# EAGLE board pi-crust-plus (EAGLE 7.6.0)
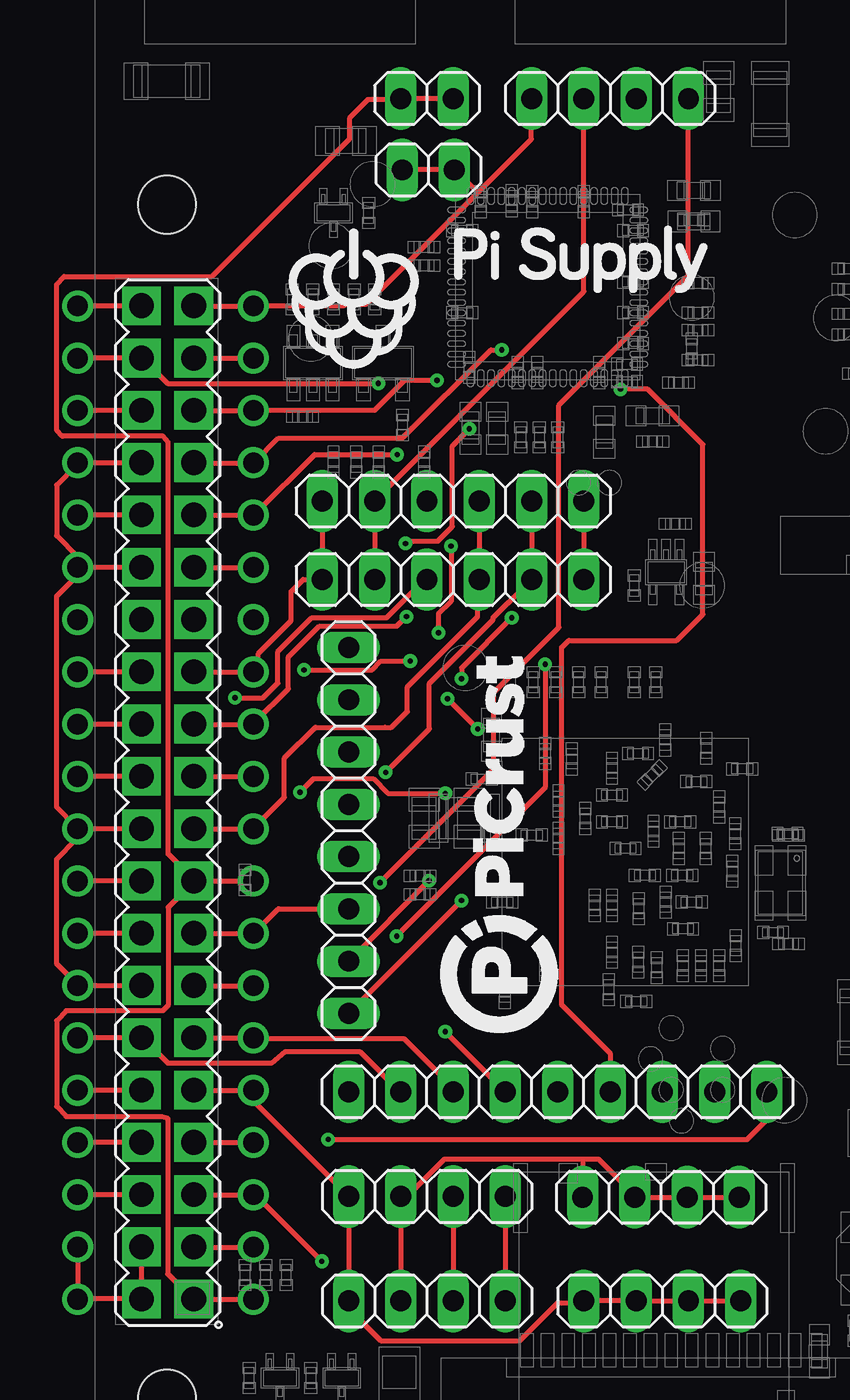
[diagram p0: board, top side]
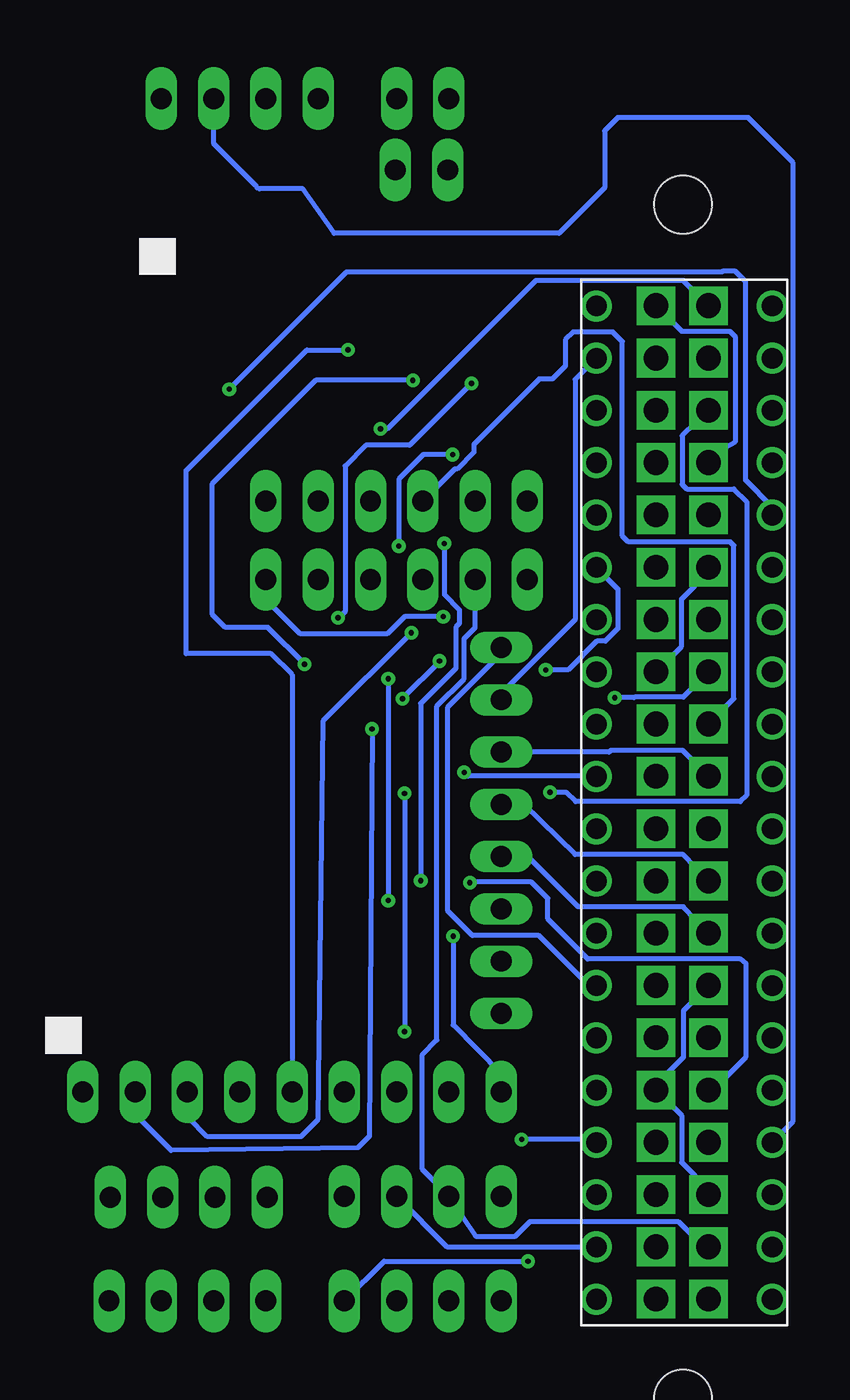
[diagram p1: board, bottom side, seen from below]

No outline drawn. Coordinates in mm, seen from the top.
Copper layers (1*16): Top 0.035mm / dielectric 1.5mm / Bottom 0.035mm
Design rules "default *": minimum track width 10mil, minimum drill 6mil, track to track 6mil, track to pad 6mil, pad to pad 6mil, via to via 6mil, smd to smd 6mil, copper to edge 40mil, drill to drill 8mil, minimum pad ring 10mil, minimum via ring 8mil, stop-mask expansion 3mil, vias tented up to drill 12mil, thermal gap 10mil
Holes 2.8 mm at 0.01,0 0.01,58
tRestrict: area -1.5,-1.6 to 1.6,1.5; area -1.5,56.4 to 1.6,59.5
bRestrict: area -1.5,-1.6 to 1.6,1.5; area -1.5,56.4 to 1.6,59.5

## Footprints (pad centres in the part's own frame; a part is rotated, then mirrored left to right if it is on the bottom)
1X04 = drill 1.016 long: 1 -3.81,0; 2 -1.27,0; 3 1.27,0; 4 3.81,0
1X02 = drill 1.016 long: 1 -1.27,0; 2 1.27,0
1X09 = drill 1.016 long: 1 -10.16,0; 2 -7.62,0; 3 -5.08,0; 4 -2.54,0; 5 0,0; 6 2.54,0; 7 5.08,0; 8 7.62,0; 9 10.16,0
1X06 = drill 1.016 long: 1 -6.35,0; 2 -3.81,0; 3 -1.27,0; 4 1.27,0; 5 3.81,0; 6 6.35,0
1X08 = drill 1.016 long: 1 -8.89,0; 2 -6.35,0; 3 -3.81,0; 4 -1.27,0; 5 1.27,0; 6 3.81,0; 7 6.35,0; 8 8.89,0
MA20-2 = drill 1.2 pad 1.88 square: 1 -15.24,-1.27; 2 -15.24,1.27; 3 -12.7,-1.27; 4 -12.7,1.27; 5 -10.16,-1.27; 6 -10.16,1.27; 7 -7.62,-1.27; 8 -7.62,1.27; 9 -5.08,-1.27; 10 -5.08,1.27; 11 -2.54,-1.27; 12 -2.54,1.27; 13 0,-1.27; 14 0,1.27; 15 2.54,-1.27; 16 2.54,1.27; 17 5.08,-1.27; 18 5.08,1.27; 19 7.62,-1.27; 20 7.62,1.27; 21 10.16,-1.27; 22 10.16,1.27; 23 12.7,-1.27; 24 12.7,1.27; 25 15.24,-1.27; 26 15.24,1.27; 27 17.78,-1.27; 28 17.78,1.27; 29 20.32,-1.27; 30 20.32,1.27; 31 22.86,-1.27; 32 22.86,1.27; 33 25.4,-1.27; 34 25.4,1.27; 35 27.94,-1.27; 36 27.94,1.27; 37 30.48,-1.27; 38 30.48,1.27; 39 33.02,-1.27; 40 33.02,1.27
MDF7-40D-2.54DSA = drill 1: P$1 -15.25,4.27; P$2 -12.71,4.27; P$3 -10.17,4.27; P$4 -7.63,4.27; P$5 -5.09,4.27; P$6 -2.55,4.27; P$7 -0.01,4.27; P$8 2.53,4.27; P$9 5.07,4.27; P$10 7.61,4.27; P$11 10.15,4.27; P$12 12.69,4.27; P$13 15.23,4.27; P$14 17.77,4.27; P$15 20.31,4.27; P$16 22.85,4.27; P$17 25.39,4.27; P$18 27.93,4.27; P$19 30.47,4.27; P$20 33.01,4.27; P$21 -15.25,-4.27; P$22 -12.71,-4.27; P$23 -10.17,-4.27; P$24 -7.63,-4.27; P$25 -5.09,-4.27; P$26 -2.55,-4.27; P$27 -0.01,-4.27; P$28 2.53,-4.27; P$29 5.07,-4.27; P$30 7.61,-4.27; P$31 10.15,-4.27; P$32 12.69,-4.27; P$33 15.23,-4.27; P$34 17.77,-4.27; P$35 20.31,-4.27; P$36 22.85,-4.27; P$37 25.39,-4.27; P$38 27.93,-4.27; P$39 30.47,-4.27; P$40 33.01,-4.27

## Placement (x,y rotation side)
JP1  GND  [1X04]  24.07,4.74 0 top
JP2  GND  [1X02]  12.7,59.69 0 top
JP3  5V  [1X04]  24,9.78 0 top
JP4  3V3  [1X02]  12.64,63.16 0 top
JP5  [1X09]  18.99,14.9 180 top
JP6  UART  [1X04]  21.53,63.16 0 top
JP7  SPI 0  [1X06]  13.91,43.6 0 top
JP8  SPI 1  [1X06]  13.91,39.79 0 top
JP9  I2C  [1X04]  12.64,9.82 0 top
JP10  I2C  [1X04]  12.64,4.74 0 top
JP11  [1X08]  8.83,27.6 90 top
SV1  [MA20-2]  0.04,20.07 90 top
U$1  MDF7-40D-2.54DSA  [MDF7-40D-2.54DSA]  -0.06,20.07 90 bottom

## Library data of the parts
JP1-JP11 = pinhead
SV1 U$1 = pi-crust

## Nets
3V3: JP4.1 JP4.2 SV1.1 SV1.17 U$1.P$1 U$1.P$9
5V: JP3.1 JP3.2 JP3.3 JP3.4 JP6.2 JP7.2 JP8.2 JP9.2 JP10.2 SV1.2 SV1.4 U$1.P$21 U$1.P$22
GND: JP1.1 JP1.2 JP1.3 JP1.4 JP2.1 JP2.2 JP6.1 JP7.1 JP8.1 JP9.1 JP10.1 SV1.6 SV1.9 SV1.14 SV1.20 SV1.25 SV1.30 SV1.34 SV1.39 U$1.P$5 U$1.P$13 U$1.P$20 U$1.P$23 U$1.P$27 U$1.P$30 U$1.P$35 U$1.P$37
GPIO_04: JP5.1 SV1.7 U$1.P$4
GPIO_05: JP5.2 SV1.29 U$1.P$15
GPIO_06: JP5.3 SV1.31 U$1.P$16
GPIO_12: JP5.4 SV1.32 U$1.P$36
GPIO_13: JP5.5 SV1.33 U$1.P$17
GPIO_16: JP5.6 SV1.36 U$1.P$38
GPIO_17: JP5.7 SV1.11 U$1.P$6
GPIO_18: JP5.8 SV1.12 U$1.P$26
GPIO_19: JP5.9 SV1.35 U$1.P$18
GPIO_20: JP11.1 SV1.38 U$1.P$39
GPIO_21: JP11.2 SV1.40 U$1.P$40
GPIO_22: JP11.3 SV1.15 U$1.P$8
GPIO_23: JP11.4 SV1.16 U$1.P$28
GPIO_24: JP11.5 SV1.18 U$1.P$29
GPIO_25: JP11.6 SV1.22 U$1.P$31
GPIO_26: JP11.7 SV1.37 U$1.P$19
GPIO_27: JP11.8 SV1.13 U$1.P$7
I2C_SCL: JP9.4 JP10.4 SV1.5 U$1.P$3
I2C_SDA: JP9.3 JP10.3 SV1.3 U$1.P$2
SPI_CE_0: JP7.3 SV1.24 U$1.P$32
SPI_CE_1: JP8.3 SV1.26 U$1.P$33
SPI_MISO: JP7.5 JP8.5 SV1.21 U$1.P$11
SPI_MOSI: JP7.4 JP8.4 SV1.19 U$1.P$10
SPI_SCLK: JP7.6 JP8.6 SV1.23 U$1.P$12
UART_RX: JP6.4 SV1.10 U$1.P$25
UART_TX: JP6.3 SV1.8 U$1.P$24

## Tracks (layer width: path | path; a pad name or v marks a point on that pad's centre or on a via)
3V3
  Top 0.254: U$1.P$1 1.31,4.82 SV1.1 1.26,4.94 1.16,4.94 0.04,6.06 0.04,13.63 -0.24,13.71 -4.89,13.71 -5.34,14.19 -5.34,18.35 -4.89,18.84 -0.19,18.84 0.07,19.09 0.07,23.87 1.23,25.03 SV1.17 | JP4.2 JP4.1 11.25,63.12 9.78,63.12 8.89,62.23 8.89,61.21 2.18,54.51 -4.98,54.51 -5.34,54.12 -5.34,47.06 -5.07,46.75 -0.16,46.75 0.07,46.47 0.07,26.46 1.26,25.26 SV1.17 | U$1.P$9 1.31,25.14 SV1.17
5V
  Top 0.254: JP8.2 JP7.2 10.18,43.7 20.26,53.79 JP6.2 | U$1.P$22 -4.33,4.84 U$1.P$21 -4.2,4.84 -1.36,4.84 SV1.2 -1.23,7.36 SV1.4 | JP10.2 JP9.2 11.47,9.9 11.75,9.9 13.48,11.62 20.19,11.62 | 20.19,11.62 20.97,11.62 22.7,9.9 JP3.2 JP3.3 JP3.4 | 20.19,11.62 JP3.1
  Bottom 0.254: SV1.4 -1.23,7.38 -0.97,7.38 0.24,8.6 7.43,8.6 8.14,7.89 10.07,7.89 JP9.2 11.45,9.92 12.66,11.14 12.66,16.7 11.95,17.41 11.95,33.65 10.63,34.97 10.63,36.92 10.1,37.45 JP8.2
GND
  Top 0.254: U$1.P$35 -1.25,40.38 SV1.30 | SV1.34 -1.25,45.46 U$1.P$37 -4.4,45.35 -5.34,44.39 -5.34,41.92 -4.35,40.91 -4.35,40.5 U$1.P$35 | JP7.1 JP8.1 6.62,39.79 6.04,39.22 6.04,37.8 4.45,36.2 4.45,35.56 4.28,35.4 U$1.P$13 1.31,35.3 SV1.25 | SV1.39 1.31,53.08 U$1.P$20 4.33,53.1 8.63,53.1 8.74,53.16 9.68,53.16 15.1,58.59 | JP1.4 JP1.3 JP1.2 JP1.1 20.16,4.66 18.99,4.66 17.14,2.81 10.4,2.81 8.93,4.28 JP10.1 JP9.1 8.75,9.92 3.8,14.87 U$1.P$5 1.31,14.98 SV1.9 | U$1.P$30 -1.25,27.68 SV1.20 | U$1.P$23 -1.25,9.9 SV1.6 | SV1.14 -1.25,20.06 U$1.P$27 -4.4,20.16 -5.34,21.12 -5.34,26.2 -4.4,27.17 -4.4,27.57 U$1.P$30 | U$1.P$35 -4.35,40.25 -4.35,39.99 -5.34,38.98 -5.34,28.74 -4.4,27.78 U$1.P$30 | 15.1,58.59 17.7,61.19 17.7,63.14 JP6.1 | JP2.1 JP2.2 14.07,59.61 15.1,58.59
  Bottom 0.254: SV1.30 -1.23,40.38 -1.23,40.15 0.07,38.85 0.07,36.54 1.28,35.32 SV1.25 | SV1.34 -1.25,45.48 -1.25,45.76 -2.52,46.47 -2.52,51.6 -2.27,51.86 0.07,51.86 1.28,53.08 SV1.39 | SV1.14 -1.23,20.06 -0.01,18.84 -0.01,16.58 1.28,15.28 1.28,15 SV1.9 1.21,14.9 0.07,13.76 0.07,11.47 -1.23,10.18 SV1.6
GPIO_04  (via drill 0.25)
  Top 0.254: U$1.P$4 1.31,12.44 SV1.7 | JP5.1 29.1,13.5 28.18,12.59 v7.84,12.59
  Bottom 0.254: v7.84,12.59 4.36,12.59 4.23,12.46 U$1.P$4
GPIO_05  (via drill 0.25)
  Top 0.254: U$1.P$15 1.31,40.38 SV1.29 | v13.63,34 v15.1,32.53 | v11.83,35.83 10.4,35.83 9.97,35.4 v6.67,35.4
  Bottom 0.254: JP5.2 26.56,13.76 24.86,12.05 15.79,12.18 15.23,12.74 v15.1,32.53 | v13.63,34 11.83,35.8 v11.83,35.83 | v6.67,35.4 5.58,35.4 4.18,36.79 3.77,36.79 3.17,37.4 3.17,39.33 U$1.P$15
GPIO_06  (via drill 0.25)
  Top 0.254: SV1.31 1.31,42.92 U$1.P$16 4.31,42.99 7.18,45.86 v11.19,45.86 | v13.2,37.2 13.2,38.12 13.81,38.73 v13.81,41.42
  Bottom 0.254: JP5.3 24.02,13.63 23.1,12.71 18.56,12.71 17.74,13.53 17.49,32.91 v13.2,37.2 | v13.81,41.42 13.81,44.67 12.61,45.86 v11.19,45.86
GPIO_12  (via drill 0.25)
  Top 0.254: U$1.P$36 -1.25,42.92 SV1.32 | JP5.4 21.53,16.78 19.17,19.14 19.17,36.46 19.53,36.83 24.77,36.83 26.04,38.1 26.04,46.35 23.35,49.04 v22.04,49.04
  Bottom 0.254: U$1.P$36 -4.33,43.32 -3.03,44.62 -3.03,54.27 -2.54,54.76 -1.93,54.76 -1.89,54.73 16.35,54.73 v22.04,49.04
GPIO_13  (via drill 0.25)
  Top 0.254: SV1.33 1.31,45.46 U$1.P$17 4.31,45.53 5.42,46.65 11.45,46.65 15.74,50.94 v16.27,50.94
  Bottom 0.254: JP5.5 18.99,35.17 20.02,36.2 24.13,36.2 24.13,45.09 18.27,50.94 v16.27,50.94
GPIO_16  (via drill 0.25)
  Top 0.254: U$1.P$38 -1.25,48 SV1.36 | v13.53,17.82 JP5.6 | v13.53,29.4 10.73,29.4 10.02,30.11 7.13,30.11 v6.47,29.45
  Bottom 0.254: v13.53,29.4 v13.53,17.82 | v6.47,29.45 5.68,29.45 5.22,29 -2.78,29 -3.08,29.3 -3.08,43.58 -2.47,44.19 -0.19,44.19 0.04,44.41 0.04,46.78 -1.23,48 SV1.36
GPIO_17
  Top 0.254: SV1.11 1.31,17.52 U$1.P$6 4.33,17.49 11.52,17.49 13.98,15.03 JP5.7
GPIO_18
  Top 0.254: U$1.P$26 -1.25,17.52 SV1.12 -1.13,17.46 0.04,16.3 5.09,16.3 5.76,16.86 9.36,16.86 11.32,14.9 JP5.8
GPIO_19  (via drill 0.25)
  Top 0.254: SV1.35 1.31,48 U$1.P$18 4.33,48.02 10.1,48.02 11.55,49.47 v13.12,49.47 | v11.17,22.47 18.38,29.68 v18.38,35.68
  Bottom 0.254: JP5.9 8.83,15.76 11.17,18.15 v11.17,22.47 | v13.12,49.47 17.84,49.47 22.86,44.45 22.86,38.1 22.23,37.47 20.17,37.47 v18.38,35.68
GPIO_20  (via drill 0.25)
  Top 0.254: U$1.P$39 -1.25,50.54 SV1.38 -1.13,50.48 0.04,49.32 v10.28,49.32 | v14.31,24.2 JP11.1 | v14.31,34.97 14.31,35.5 v16.75,37.94
  Bottom 0.254: v14.31,34.97 v14.31,24.2 | v16.75,37.94 16.75,37.89 16.41,38.23 16.41,45.31 15.4,46.32 13.27,46.32 v10.28,49.32
GPIO_21  (via drill 0.25)
  Top 0.254: U$1.P$40 -1.25,53.08 SV1.40 | v12.74,25.16 JP11.2 | v14.7,47.11 13.87,46.28 13.87,42.37 13.16,41.66 11.73,41.66 11.62,41.54 v11.6,41.54
  Bottom 0.254: v12.74,25.16 12.74,33.77 11.04,35.47 11.04,37.48 10.86,37.66 10.86,38.32 11.6,39.05 v11.6,41.54 | v14.7,47.11 14.37,47.11 7.15,54.32 -0.01,54.32 SV1.40
GPIO_22
  Top 0.254: SV1.15 1.31,22.6 U$1.P$8 4.31,22.67 5.42,23.79 JP11.3
GPIO_23
  Top 0.254: U$1.P$28 -1.25,22.6 SV1.16
  Bottom 0.254: SV1.16 -0.01,23.89 5.09,23.89 7.47,26.26 8.76,26.26 JP11.4
GPIO_24
  Top 0.254: U$1.P$29 -1.25,25.14 SV1.18
  Bottom 0.254: JP11.5 7.74,28.87 5.25,26.43 -0.01,26.43 -1.23,25.16 SV1.18
GPIO_25
  Top 0.254: U$1.P$31 -1.25,30.22 SV1.22
  Bottom 0.254: SV1.22 0.03,31.5 3.5,31.5 3.59,31.41 JP11.6
GPIO_26
  Top 0.254: U$1.P$19 1.31,50.54 SV1.37
  Bottom 0.254: JP11.7 8.83,34.25 5.25,37.84 5.25,49.52 4.23,50.54 U$1.P$19
GPIO_27
  Top 0.254: U$1.P$7 1.31,20.06 SV1.13
  Bottom 0.254: JP11.8 8.83,36.19 11.42,33.59 11.42,23.69 10.23,22.49 7,22.49 4.59,20.08 U$1.P$7
I2C_SCL  (via drill 0.25)
  Top 0.254: SV1.5 1.31,9.9 U$1.P$3 4.33,9.87 v7.53,6.67 | JP9.4 JP10.4
  Bottom 0.254: v7.53,6.67 14.52,6.67 JP10.4
I2C_SDA
  Top 0.254: U$1.P$2 1.31,7.36 SV1.3 | JP9.3 JP10.3
  Bottom 0.254: JP9.3 11.47,7.38 4.23,7.38 U$1.P$2
SPI_CE_0
  Top 0.254: U$1.P$32 -1.25,32.76 SV1.24
  Bottom 0.254: SV1.24 -1.25,32.78 -2.47,34 -2.47,41.44 -2.3,41.62 2.66,41.62 2.95,41.91 2.95,51.36 3.4,51.82 5.33,51.82 5.71,51.44 5.71,50.16 6.35,49.53 6.99,49.53 10.16,46.35 10.16,45.97 10.97,45.16 11.08,45.16 JP7.3
SPI_CE_1  (via drill 0.25)
  Top 0.254: U$1.P$33 -1.25,35.3 SV1.26 | JP8.3 12.54,39.79 10.68,37.94 7.05,37.94 5.4,36.29 5.4,34.76 4.67,34.04 3.33,34.04 v3.32,34.05
  Bottom 0.254: SV1.26 -1.23,35.3 -0.01,34.08 2.35,34.08 2.38,34.05 v3.32,34.05
SPI_MISO  (via drill 0.25)
  Top 0.254: JP7.5 JP8.5 | U$1.P$11 1.31,30.22 SV1.21 | 17.41,39.72 17.62,39.72 JP8.5 | v10.63,30.42 12.75,32.54 12.75,34.75 15.85,37.85 15.85,37.95 16.56,38.66 16.59,38.66 JP8.5
  Bottom 0.254: v10.63,30.42 10.46,30.24 4.23,30.24 U$1.P$11
SPI_MOSI
  Top 0.254: JP7.4 JP8.4 15.1,39.69 15.1,37.99 11.68,34.57 11.68,33.38 10.91,32.6 10.6,32.61 7.21,32.61 5.71,31.11 5.71,29.21 4.28,27.78 U$1.P$10 1.31,27.68 SV1.19
SPI_SCLK  (via drill 0.25)
  Top 0.254: JP7.6 JP8.6 | SV1.23 1.31,32.76 U$1.P$12 4.28,32.86 5.91,34.48 5.91,36.03 7.41,37.53 11.17,37.53 11.62,37.99 v11.65,37.99
  Bottom 0.254: v11.65,37.99 13.53,37.99 14.37,37.15 18.58,37.15 20.26,38.83 JP8.6
UART_RX  (via drill 0.25)
  Top 0.254: U$1.P$25 -1.25,14.98 SV1.10 | JP6.4 25.34,54.55 19.05,48.26 19.05,37.47 15.89,34.3 15.89,30.6 v10.35,25.06
  Bottom 0.254: SV1.10 -1.41,14.95 -3.06,16.6 -3.06,21.12 -2.78,21.35 4.64,21.35 5.25,21.96 6.57,23.31 6.57,24.3 7.37,25.09 10.32,25.09 v10.35,25.06
UART_TX
  Top 0.254: U$1.P$24 -1.25,12.44 SV1.8
  Bottom 0.254: U$1.P$24 -4.35,12.46 -5.34,13.48 -5.34,60.03 -3.17,62.23 3.17,62.23 3.81,61.59 3.81,58.83 6.02,56.62 16.94,56.62 18.47,58.78 20.57,58.78 20.69,58.82 20.75,58.93 22.78,60.96 22.78,63.14 JP6.3

## Text on the board
tValues: Pi Crust Plus | V1.0 | GND | 5V | TX | RX | picru.st / pi-supply.com | GND | 5V | CE0 | MOSI | MISO | SCLK | 27 | GPIO | 26 | 25 | 24 | 23 | 22 | 21 | 20 | GPIO | 19 | 18 | 17 | 16 | 13 | 12 | 06 | 05 | 04 | GND | 5V | SDA | SCL